# EAGLE board psu (EAGLE 7.4.0)
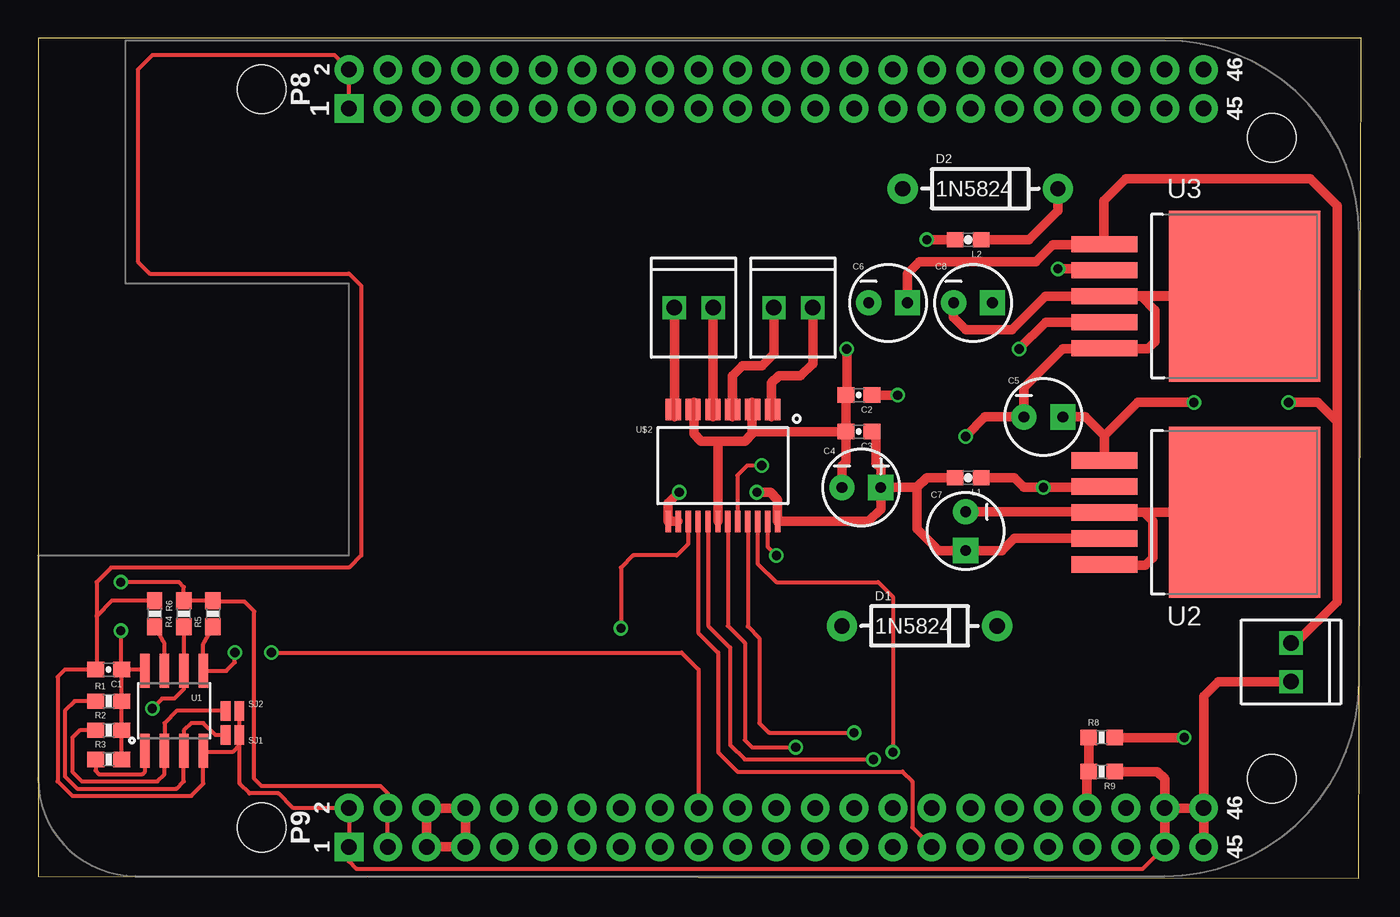
[diagram p0: board, top side]
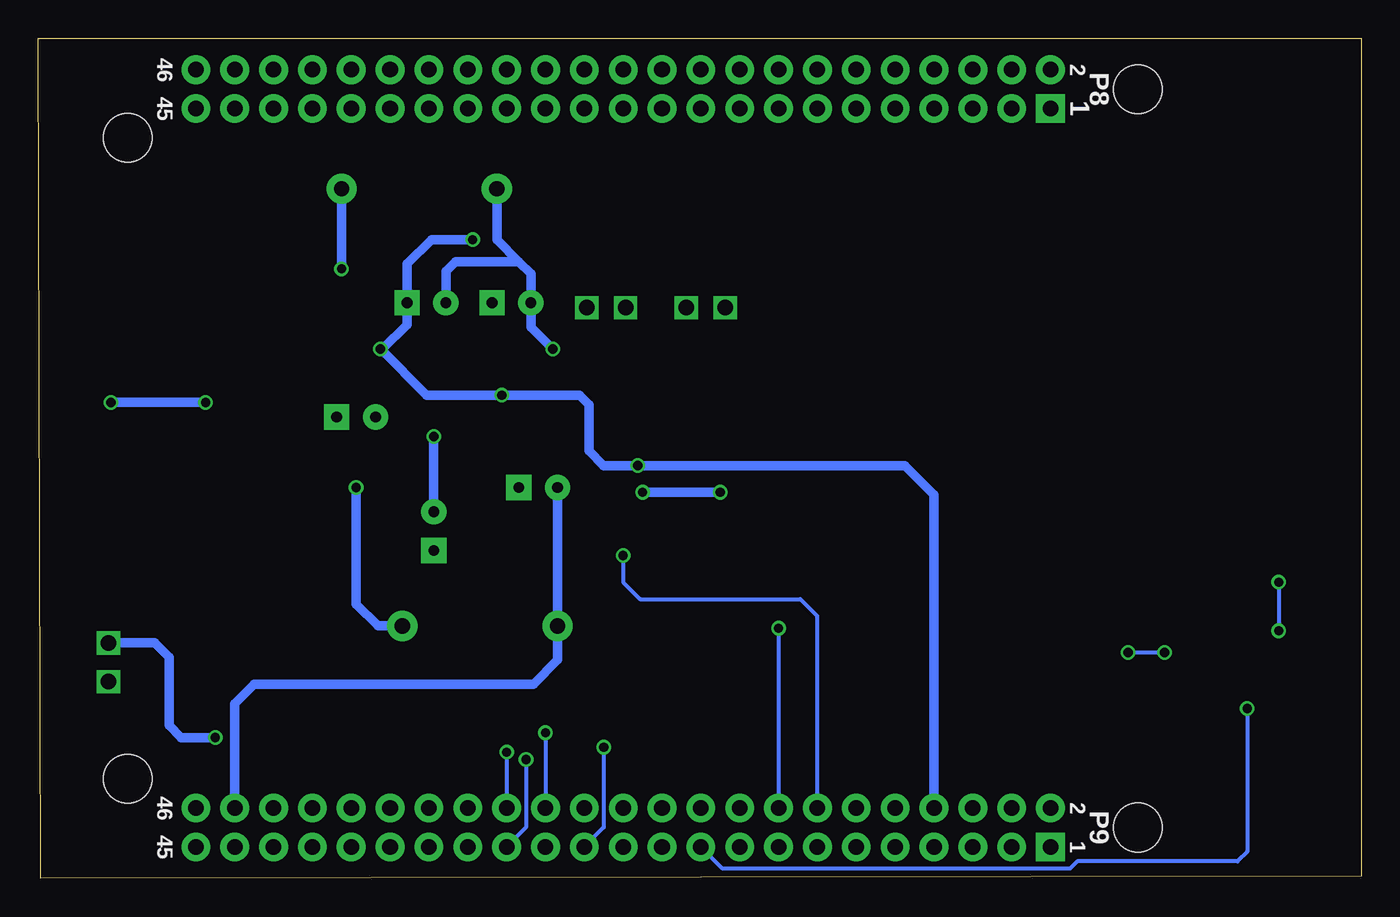
[diagram p1: board, bottom side, seen from below]

Size 86.51 x 54.92 mm. Coordinates in mm from the lower left corner, seen from the top.
Outline: 0,0.16 86.35,0 86.51,54.92 0,54.92 0,0.16
Copper layers (1*16): Top 0.0356mm / dielectric 1.5011mm / Bottom 0.0356mm
Design rules "LaenPCBOrder": minimum track width 6mil, minimum drill 13mil, track to track 6mil, track to pad 6mil, pad to pad 6mil, via to via 6mil, smd to smd 6mil, copper to edge 15mil, drill to drill 6mil, minimum pad ring 7mil, minimum via ring 7mil, stop-mask expansion 3mil, vias tented up to drill 0mil, thermal gap 10mil

## Footprints (pad centres in the part's own frame; a part is rotated, then mirrored left to right if it is on the bottom)
0603-CAP = smd 1.1 x 1: 1 -0.85,0; 2 0.85,0
CPOL-RADIAL-10UF-25V-KIT = drill 0.7 pad 1.651 square: 1 1.27,0 | drill 0.7 pad 1.651: 2 -1.27,0
CPOL-RADIAL-10UF-25V = drill 0.7 pad 1.651 square: 1 1.27,0 | drill 0.7 pad 1.651: 2 -1.27,0
DIODE-1N4001 = drill 1 pad 1.981: A -5.08,0; C 5.08,0
1X02_2.54_SCREWTERM = drill 1.016 square: P1 2.54,0; P2 0,0
0603 = smd 1.1 x 1: 1 -0.85,0; 2 0.85,0
0603-RES = smd 1.1 x 1: 1 -0.85,0; 2 0.85,0
PAD-JUMPER-2-NO_NO_SILK = smd 0.635 x 1.27: 1 -0.45,0; 2 0.45,0
SO08 = smd 0.61 x 2.21: 1 -1.905,-2.616; 2 -0.635,-2.616; 3 0.635,-2.616; 4 1.905,-2.616; 5 1.905,2.616; 6 0.635,2.616; 7 -0.635,2.616; 8 -1.905,2.616
TO-263 = smd 1.07 x 4.32: 1 2.2,-14.1; 2 3.9,-14.1; 3 5.6,-14.1; 4 7.3,-14.1; 5 9,-14.1 | smd 11.18 x 9.91: 6 5.6,-4.955
BEAGLE_BONE_BLACK_CAPE = drill 1.016 pad 1.88 square: P8.1 20.32,50.165; P9.1 20.32,1.905 | drill 1.016 pad 1.88: P8.2 20.32,52.705; P8.3 22.86,50.165; P8.4 22.86,52.705; P8.5 25.4,50.165; P8.6 25.4,52.705; P8.7 27.94,50.165; P8.8 27.94,52.705; P8.9 30.48,50.165; P8.10 30.48,52.705; P8.11 33.02,50.165; P8.12 33.02,52.705; P8.13 35.56,50.165; P8.14 35.56,52.705; P8.15 38.1,50.165; P8.16 38.1,52.705; P8.17 40.64,50.165; P8.18 40.64,52.705; P8.19 43.18,50.165; P8.20 43.18,52.705; P8.21 45.72,50.165; P8.22 45.72,52.705; P8.23 48.26,50.165; P8.24 48.26,52.705; P8.25 50.8,50.165; P8.26 50.8,52.705; P8.27 53.34,50.165; P8.28 53.34,52.705; P8.29 55.88,50.165; P8.30 55.88,52.705; P8.31 58.42,50.165; P8.32 58.42,52.705; P8.33 60.96,50.165; P8.34 60.96,52.705; P8.35 63.5,50.165; P8.36 63.5,52.705; P8.37 66.04,50.165; P8.38 66.04,52.705; P8.39 68.58,50.165; P8.40 68.58,52.705; P8.41 71.12,50.165; P8.42 71.12,52.705; P8.43 73.66,50.165; P8.44 73.66,52.705; P8.45 76.2,50.165; P8.46 76.2,52.705; P9.2 20.32,4.445; P9.3 22.86,1.905; P9.4 22.86,4.445; P9.5 25.4,1.905; P9.6 25.4,4.445; P9.7 27.94,1.905; P9.8 27.94,4.445; P9.9 30.48,1.905; P9.10 30.48,4.445; P9.11 33.02,1.905; P9.12 33.02,4.445; P9.13 35.56,1.905; P9.14 35.56,4.445; P9.15 38.1,1.905; P9.16 38.1,4.445; P9.17 40.64,1.905; P9.18 40.64,4.445; P9.19 43.18,1.905; P9.20 43.18,4.445; P9.21 45.72,1.905; P9.22 45.72,4.445; P9.23 48.26,1.905; P9.24 48.26,4.445; P9.25 50.8,1.905; P9.26 50.8,4.445; P9.27 53.34,1.905; P9.28 53.34,4.445; P9.29 55.88,1.905; P9.30 55.88,4.445; P9.31 58.42,1.905; P9.32 58.42,4.445; P9.33 60.96,1.905; P9.34 60.96,4.445; P9.35 63.5,1.905; P9.36 63.5,4.445; P9.37 66.04,1.905; P9.38 66.04,4.445; P9.39 68.58,1.905; P9.40 68.58,4.445; P9.41 71.12,1.905; P9.42 71.12,4.445; P9.43 73.66,1.905; P9.44 73.66,4.445; P9.45 76.2,1.905; P9.46 76.2,4.445 | hole 3.175: 14.605,3.175; 80.645,6.35; 80.645,48.26; 14.605,51.435
SSOP24 = smd 0.348 x 1.397: 1 -3.575,-3.656; 2 -2.925,-3.656; 3 -2.275,-3.656; 4 -1.625,-3.656; 5 -0.975,-3.656; 6 -0.325,-3.656; 7 0.325,-3.656; 8 0.975,-3.656; 9 1.625,-3.656; 10 2.275,-3.656; 11 2.925,-3.656; 12 3.575,-3.656; 13 3.575,3.656; 14 2.925,3.656; 15 2.275,3.656; 16 1.625,3.656; 17 0.975,3.656; 18 0.325,3.656; 19 -0.325,3.656; 20 -0.975,3.656; 21 -1.625,3.656; 22 -2.275,3.656; 23 -2.925,3.656; 24 -3.575,3.656

## Placement (x,y rotation side)
C1  0.1uF  [0603-CAP]  4.6,13.65 180 top
C2  0.1uF  [0603-CAP]  53.66,31.59 180 top
C3  0.1uF  [0603-CAP]  53.66,29.21 180 top
C4  [CPOL-RADIAL-10UF-25V-KIT]  53.82,25.56 0 top
C5  680uF  [CPOL-RADIAL-10UF-25V]  65.72,30.16 0 top
C6  680 uF  [CPOL-RADIAL-10UF-25V]  55.56,37.62 0 top
C7  220uF  [CPOL-RADIAL-10UF-25V]  60.64,22.7 270 top
C8  220 uF  [CPOL-RADIAL-10UF-25V]  61.12,37.62 0 top
D1  1N5824  [DIODE-1N4001]  57.63,16.51 0 top
D2  1N5824  [DIODE-1N4001]  61.59,45.09 0 top
FRAME2  FRAME-LEDGER  [CREATIVE_COMMONS]  12.06,-28.57 0 top  (outside the outline)
JP1  [1X02_2.54_SCREWTERM]  81.92,15.4 270 top
JP2  [1X02_2.54_SCREWTERM]  48.1,37.31 0 top
JP3  [1X02_2.54_SCREWTERM]  41.59,37.31 0 top
L1  33 uH  [0603]  60.8,26.19 180 top
L2  33 uH  [0603]  60.8,41.75 180 top
R1  4.7K  [0603-RES]  4.6,11.59 0 top
R2  4.7K  [0603-RES]  4.6,9.68 0 top
R3  4.7K  [0603-RES]  4.6,7.78 0 top
R4  4.7K  [0603-RES]  9.53,17.3 90 top
R5  4.7K  [0603-RES]  11.43,17.3 90 top
R6  10K  [0603-RES]  7.62,17.3 270 top
R8  10K  [0603-RES]  69.53,9.21 0 top
R9  10K  [0603-RES]  69.53,6.99 180 top
SJ1  JUMPER-PAD-2-NO  [PAD-JUMPER-2-NO_NO_SILK]  12.7,9.37 180 top
SJ2  JUMPER-PAD-2-NO  [PAD-JUMPER-2-NO_NO_SILK]  12.7,10.95 180 top
U1  EEPROM-I2CSMD  [SO08]  8.89,10.95 0 top
U2  LM2596  [TO-263]  83.82,29.53 270 top
U3  LM2596  [TO-263]  83.82,43.66 270 top
U$1  BEAGLE_BONE_BLACK_CAPE  [BEAGLE_BONE_BLACK_CAPE]  0,0.16 0 top
U$2  TB6612FNG  [SSOP24]  44.77,26.99 180 top

## Library data of the parts
C1-C3 = SparkFun-Capacitors; PROD_ID: CAP-00810
C4 = SparkFun-Capacitors; PROD_ID: CAP-08440
C5-C8 = SparkFun-Capacitors
D1 D2 = SparkFun-DiscreteSemi
FRAME2 = SparkFun-Aesthetics
JP1-JP3 = SparkFun-Connectors
L1 L2 SJ1 SJ2 = SparkFun-Passives
R1-R5 = SparkFun-Resistors; PROD_ID: RES-07857
R6 R8 R9 = SparkFun-Resistors; PROD_ID: RES-00824
U1 = SparkFun-DigitalIC
U2 U3 = psu
U$1 = SparkFun-Boards
U$2 = SparkFun-PowerIC; PROD_ID: IC-09363

## Nets
3.3V: C1.1 R1.2 R2.2 R3.2 R4.2 R5.2 U1.8 U$1.P9.3 U$1.P9.4
A01: JP2.P1 U$2.1 U$2.2
A02: JP2.P2 U$2.5 U$2.6
AIN1: U$1.P9.28 U$2.21
AIN2: U$1.P9.30 U$2.22
B01: JP3.P2 U$2.11 U$2.12
B02: JP3.P1 U$2.7 U$2.8
BIN1: U$1.P9.29 U$2.17
BIN2: U$1.P9.31 U$2.16
GND: C1.2 C2.2 C3.2 C4.2 C5.2 C6.2 C7.2 C8.2 D1.A D2.A JP1.P1 R6.1 R9.1 SJ1.1 SJ2.1 U1.4 U2.3 U2.5 U2.6 U3.3 U3.5 U3.6 U$1.P8.1 U$1.P8.2 U$1.P9.1 U$1.P9.2 U$1.P9.43 U$1.P9.44 U$1.P9.45 U$1.P9.46 U$2.3 U$2.4 U$2.9 U$2.10 U$2.18
N$1: R3.1 U1.1
N$2: R2.1 SJ2.2 U1.2
N$3: R1.1 SJ1.2 U1.3
N$4: R8.1 R9.2 U$1.P9.40
N$5: R6.2 U1.7
N$6: U$1.P9.15
N$7: U$1.P9.13
N$8: D1.C L1.1 U2.2
N$9: D2.C L2.1 U3.2
PWMA: U$1.P9.14 U$2.23
PWMB: U$1.P9.16 U$2.15
SCL: R4.1 U1.6 U$1.P9.19
SDA: R5.1 U1.5 U$1.P9.20
STBY: U$1.P9.25 U$2.19
V_BATT: C5.1 C6.1 JP1.P2 R8.2 U2.1 U3.1
V_CPU: C2.1 C8.1 L2.2 U3.4 U$1.P9.5 U$1.P9.6 U$1.P9.7 U$1.P9.8 U$2.20
V_MOTOR: C3.1 C4.1 C7.1 L1.2 U2.4 U$2.13 U$2.14 U$2.24

## Tracks (layer width: path | path; a pad name or v marks a point on that pad's centre or on a via)
3.3V  (via drill 0.6)
  Top 0.254: C1.1 5.71,13.65 | U1.8 6.9,13.65 5.71,13.65 | R3.2 R2.2 R1.2 C1.1 | 5.71,13.65 5.56,13.49 | v5.4,19.37 9.21,19.37 9.53,19.05 R4.2 R5.2 11.49,18.1 13.49,18.1 14.13,17.46 14.13,6.51 14.61,6.03 22.38,6.03 22.86,5.56 U$1.P9.4 U$1.P9.3 | v5.4,16.19 5.4,13.71 C1.1
  Bottom 0.254: v5.4,19.37 v5.4,16.19
A01
  Top 0.254: U$2.2 U$2.1 48.11,30.64 48.1,30.64 47.94,30.16
  Top 0.61: 47.94,30.16 47.94,32.38 48.42,32.86 49.85,32.86 50.64,33.65 JP2.P1
A02
  Top 0.254: 45.41,30.64 U$2.6 | U$2.5 45.41,30.64 | 45.41,30.64 45.4,30.16
  Top 0.61: 45.4,30.16 45.4,32.86 46.04,33.5 47.31,33.5 48.1,34.29 JP2.P2
AIN1  (via drill 0.6)
  Top 0.254: U$2.21 46.39,16.47 47.15,15.72 47.15,10.16 47.78,9.52 v53.34,9.52
  Bottom 0.254: v53.34,9.52 U$1.P9.28
AIN2  (via drill 0.6)
  Top 0.254: U$2.22 47.04,20.58 48.26,19.37 54.93,19.37 55.88,18.41 v55.88,8.25
  Bottom 0.254: v55.88,8.25 U$1.P9.30
B01
  Top 0.254: U$2.12 U$2.11 41.6,30.64 41.59,30.16
  Top 0.61: 41.59,30.16 JP3.P2
B02
  Top 0.254: U$2.8 U$2.7 44.29,30.64 44.13,30.16
  Top 0.61: 44.13,30.16 JP3.P1
BIN1  (via drill 0.6)
  Top 0.254: U$2.17 43.79,16.53 45.24,15.08 45.24,8.73 46.2,7.78 v54.61,7.78
  Bottom 0.254: v54.61,7.78 54.61,3.33 U$1.P9.29
BIN2
  Top 0.254: U$2.16 43.14,16.07 44.45,14.76 44.45,8.25 45.72,6.98 56.52,6.98 57.15,6.35 57.15,3.33 U$1.P9.31
GND  (via drill 0.6)
  Top 0.254: SJ2.1 SJ1.1 | SJ1.1 13.15,8.7 12.7,8.25 10.88,8.25 U1.4 10.79,6.19 10,5.4 2.22,5.4 1.27,6.35 1.27,13.18 1.75,13.65 C1.2 3.81,13.71 3.81,17.14 | R6.1 4.82,18.15 3.81,17.14 | U$1.P8.1 U$1.P8.2 19.37,53.82 7.46,53.82 6.51,52.86 6.51,40.32 7.3,39.53 20.32,39.53 21.11,38.73 21.11,21.11 20.32,20.32 4.76,20.32 3.81,19.37 3.81,17.14 | U$1.P9.2 U$1.P9.1 | U$1.P9.2 16.67,4.6 15.72,5.56 13.81,5.56 13.18,6.19 13.18,9.34 SJ1.1 | U$1.P9.2 20.32,1.11 20.8,0.63 72.23,0.63 U$1.P9.43 | U$2.3 U$2.4 46.67,30.64 | U$2.10 U$2.9 42.87,30.64 42.86,31.11 | 46.67,31.11 46.99,30.64 | 46.83,29.21 46.67,29.05 | U$2.18 | 78.66,38.26 74.61,38.26 74.3,37.94
  Top 0.406: 69.77,20.48 U2.5
  Top 0.61: U$1.P9.43 U$1.P9.44 | U$1.P9.45 U$1.P9.46 | U$1.P9.46 U$1.P9.44 | 72.12,38.06 U3.3 65.84,38.06 63.66,35.88 60.64,35.88 59.85,36.67 C8.2 | 77.27,38.06 77.47,38.26 78.66,38.26 78.5,38.1 70.33,38.1 70.37,38.06 U3.6 72.12,38.06 | 42.86,31.11 42.86,29.05 43.34,28.57 44.45,28.57 | 44.45,28.57 46.2,28.57 46.67,29.05 46.67,30.64 46.67,31.11 | C3.2 46.83,29.21 | C3.2 52.81,27.25 52.55,26.99 C4.2 | C3.2 C2.2 52.86,31.65 v52.86,34.61 | R9.1 73.18,6.98 73.66,6.51 U$1.P9.44 | 44.45,28.57 U$2.18 | 72.28,23.93 U2.3 69.68,23.97 C7.2 | 72.28,23.93 72.87,23.34 72.87,20.95 72.39,20.48 69.77,20.48 | 72.12,38.06 73.03,37.15 73.03,35.08 72.55,34.61 69.77,34.61 U3.5 69.67,34.61 66.99,34.61 64.45,32.07 C5.2 61.91,30.16 v60.64,28.89 | U2.6 72.28,23.93 | JP1.P1 77.15,12.86 76.2,11.91 U$1.P9.46
  Bottom 0.61: C4.2 D1.A 52.55,14.29 54.13,12.7 72.39,12.7 73.66,11.43 U$1.P9.44 | 55.09,40.32 54.29,39.53 C6.2 54.29,36.04 v52.86,34.61 | 55.09,40.32 59.21,40.32 59.85,39.69 C8.2 | 55.09,40.32 56.52,41.75 D2.A | v60.64,28.89 C7.2
N$1
  Top 0.254: R3.1 3.75,7.04 3.97,6.83 6.83,6.83 6.99,6.98 U1.1
N$2
  Top 0.254: R2.1 2.7,9.68 2.22,9.21 2.22,6.98 2.86,6.35 7.78,6.35 8.26,6.83 U1.2 8.26,10.16 9.05,10.95 SJ2.2
N$3
  Top 0.254: R1.1 2.38,11.59 1.75,10.95 1.75,6.67 2.54,5.87 9.05,5.87 9.53,6.35 U1.3 9.53,9.68 10,10.16 10.79,10.16 11.59,9.37 SJ1.2
N$4
  Top 0.254: 68.58,6.88 R9.2
  Top 0.61: U$1.P9.40 68.58,6.88 | R9.2 R8.1
N$5
  Top 0.254: U1.7 8.26,15.34 R6.2
N$8  (via drill 0.6)
  Top 0.61: L1.1 63.82,26.19 64.45,25.56 v65.72,25.56 69.65,25.56 U2.2
  Bottom 0.61: D1.C 64.29,16.51 65.72,17.94 v65.72,25.56
N$9  (via drill 0.6)
  Top 0.406: 69.63,39.85 U3.2
  Top 0.61: L2.1 64.77,41.75 66.67,43.66 D2.C | v66.67,39.85 69.63,39.85
  Bottom 0.61: D2.C v66.67,39.85
PWMA  (via drill 0.6)
  Top 0.254: U$2.23 47.69,21.68 v48.26,21.11
  Bottom 0.254: U$1.P9.14 35.56,17.14 36.43,18.02 36.67,18.26 47.15,18.26 48.26,19.37 v48.26,21.11
PWMB  (via drill 0.6)
  Top 0.254: U$2.15 42.49,21.85 41.75,21.11 38.89,21.11 38.1,20.32 v38.1,16.35
  Bottom 0.254: v38.1,16.35 U$1.P9.16
SCL  (via drill 0.6)
  Top 0.254: R4.1 U1.6 9.53,12.38 8.89,11.75 8.1,11.75 v7.46,11.11
  Bottom 0.254: v7.46,11.11 7.46,1.75 8.1,1.11 18.57,1.11 19.05,0.63 41.75,0.63 U$1.P9.19
SDA  (via drill 0.6)
  Top 0.254: R5.1 10.79,15.34 U1.5 12.3,13.57 12.86,14.13 v12.86,14.76 | v15.24,14.76 42.07,14.76 43.18,13.65 U$1.P9.20
  Bottom 0.254: v12.86,14.76 v15.24,14.76
STBY  (via drill 0.6)
  Top 0.254: U$2.19 45.09,16.5 46.2,15.4 46.2,9.05 46.67,8.57 v49.53,8.57
  Bottom 0.254: v49.53,8.57 49.53,3.33 U$1.P9.25
V_BATT  (via drill 0.6)
  Top 0.254: JP1.P2 82.23,15.4
  Top 0.406: 69.7,41.43 U3.1
  Top 0.61: 82.23,15.4 84.93,18.1 84.93,29.84 | 84.93,29.84 84.93,43.97 83.19,45.72 71.12,45.72 69.69,44.29 69.69,41.48 U3.1 | U2.1 69.72,28.92 | 69.72,28.92 71.91,31.11 v75.56,31.11 | 84.93,29.84 83.66,31.11 v81.76,31.11 | v74.93,9.21 R8.2 | C6.1 56.83,39.53 57.63,40.32 65.25,40.32 66.36,41.43 69.7,41.43 | C5.1 68.48,30.16 69.72,28.92
  Bottom 0.61: v75.56,31.11 v81.76,31.11 | JP1.P2 78.9,15.4 77.95,14.45 77.95,10 77.15,9.21 v74.93,9.21
V_CPU  (via drill 0.6)
  Top 0.254: v47.31,26.99 46.35,26.99 45.72,26.35 45.72,23.47 U$2.20
  Top 0.61: v56.2,31.59 C2.1 | U3.4 65.88,36.36 v64.14,34.61 | v58.1,41.75 L2.2 | U$1.P9.5 U$1.P9.6 U$1.P9.8 U$1.P9.7 U$1.P9.5
  Bottom 0.61: v58.1,41.75 60.8,41.75 62.39,40.16 C8.1 62.39,36.19 63.98,34.61 v64.14,34.61 61.12,31.59 v56.2,31.59 51.12,31.59 50.48,30.96 50.48,27.94 49.53,26.99 v47.31,26.99 29.84,26.99 27.94,25.08 U$1.P9.8
V_MOTOR  (via drill 0.6)
  Top 0.254: 54.77,28.95 C3.1
  Top 0.61: C4.1 55.09,26.83 54.77,27.15 54.77,28.95 | C4.1 55.16,25.47 55.22,25.56 57.47,25.56 | U2.4 69.56,22.22 63.82,22.22 63.02,21.43 C7.1 58.9,21.43 57.47,22.86 57.47,25.56 | L1.2 58.1,26.19 57.47,25.56 | v41.91,25.24 41.19,24.52 U$2.13 U$2.14 | v46.99,25.24 47.86,25.24 48.34,24.76 48.34,23.41 | 48.34,23.41 U$2.24 | 48.34,23.41 U$2.24 54.29,23.34 55.09,24.13 C4.1
  Bottom 0.61: v41.91,25.24 v46.99,25.24